# Altium PCB PCB IMU module.PcbDoc
Units mm, origin at the board's own origin, x right, y up, seen from the top; angles counter-clockwise.
Board outline 25 x 32.5 mm, 4 copper layers (L1(Sig), L2(GND), L3(GND), L4(Sig)), stack 0.749 mm thick; 73 components, 47 nets, 262 pads, 185 vias.
Unrouted connection lines stored in the file: 13.
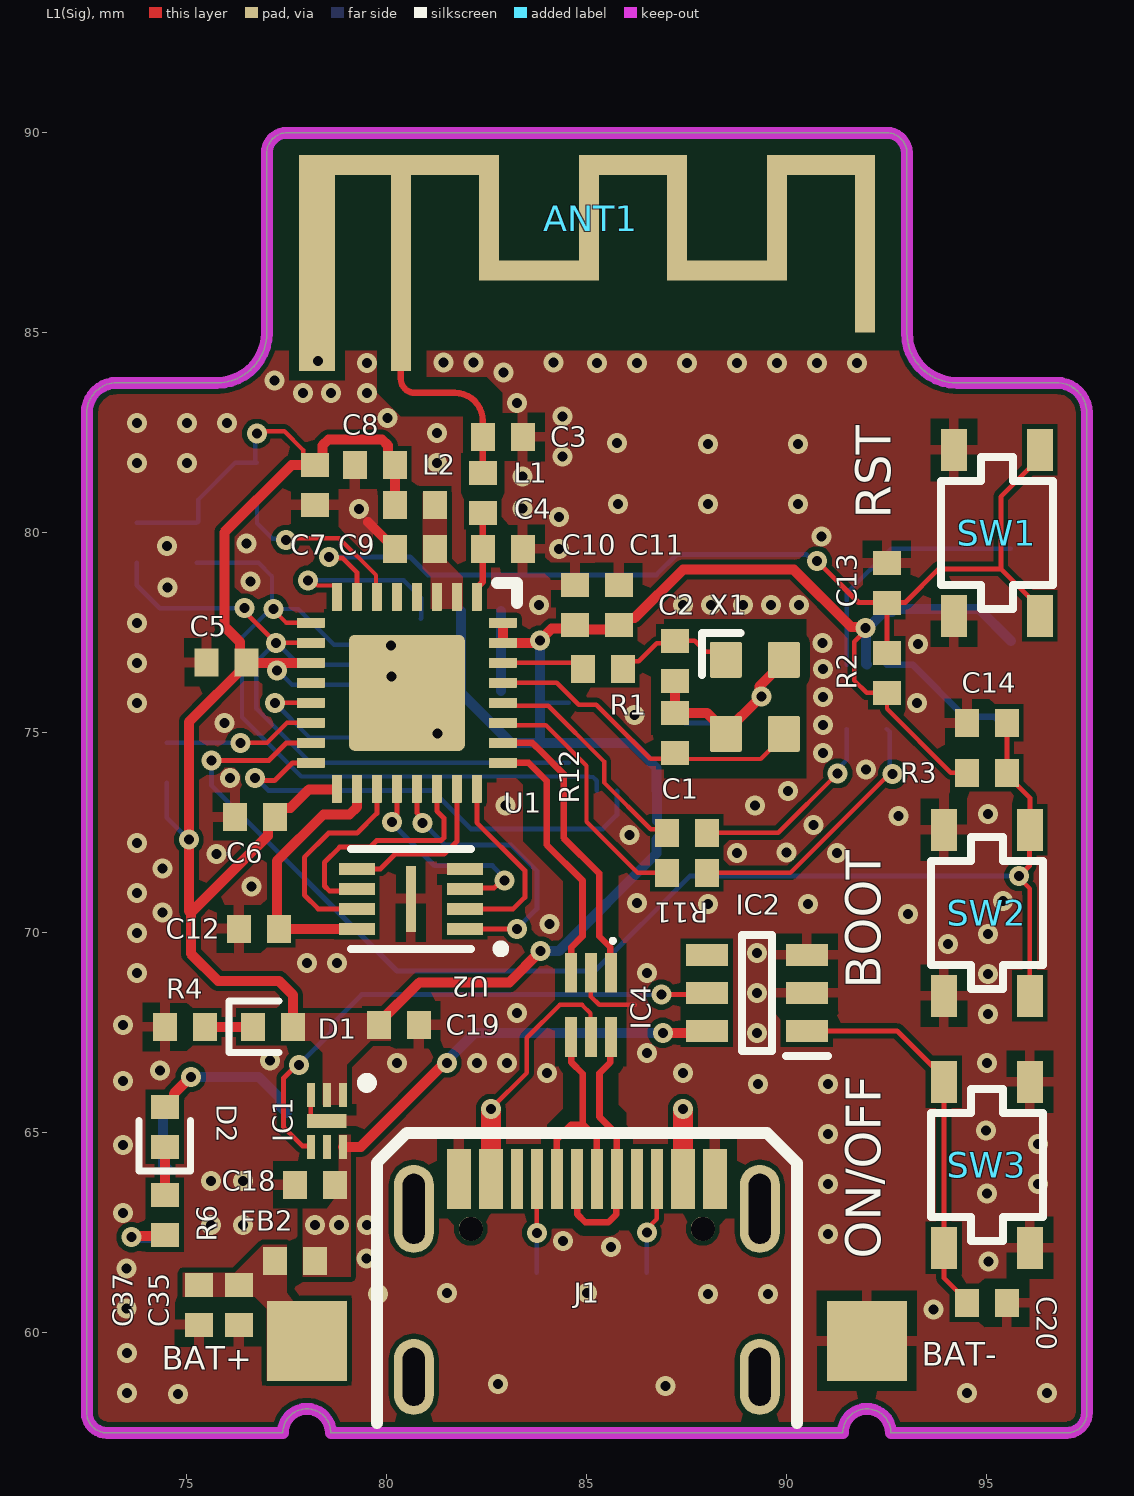
[diagram p0: L1(Sig) view]
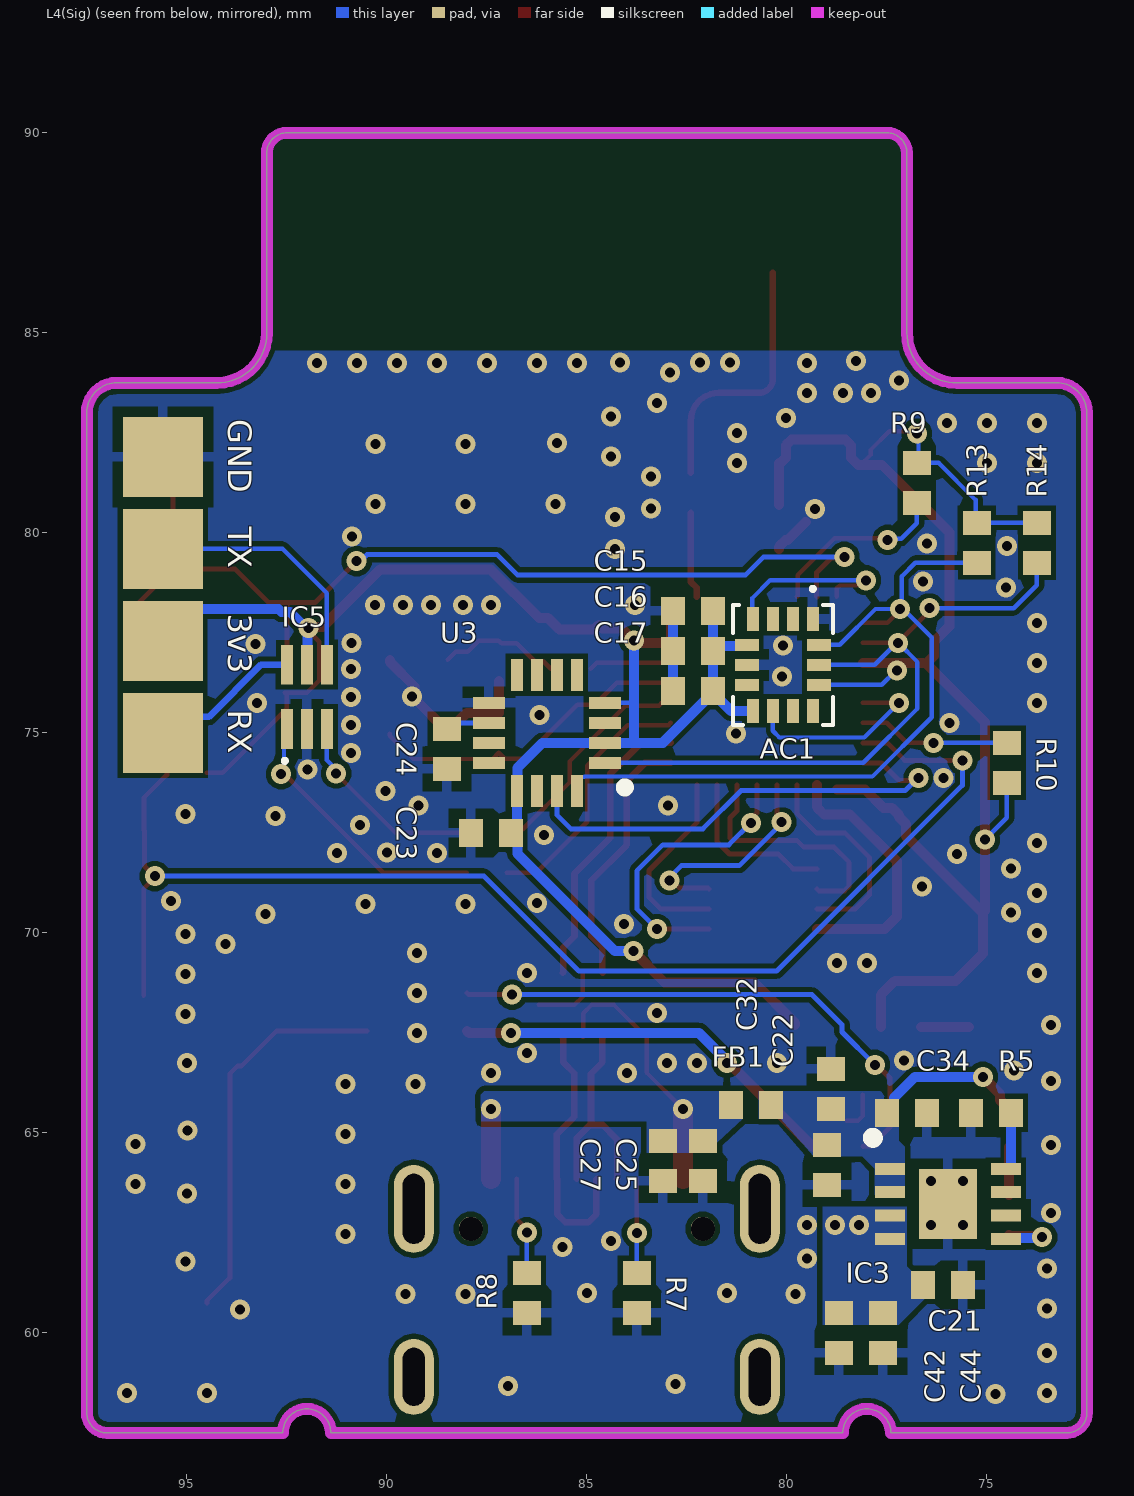
[diagram p1: L4(Sig) view, seen from below]
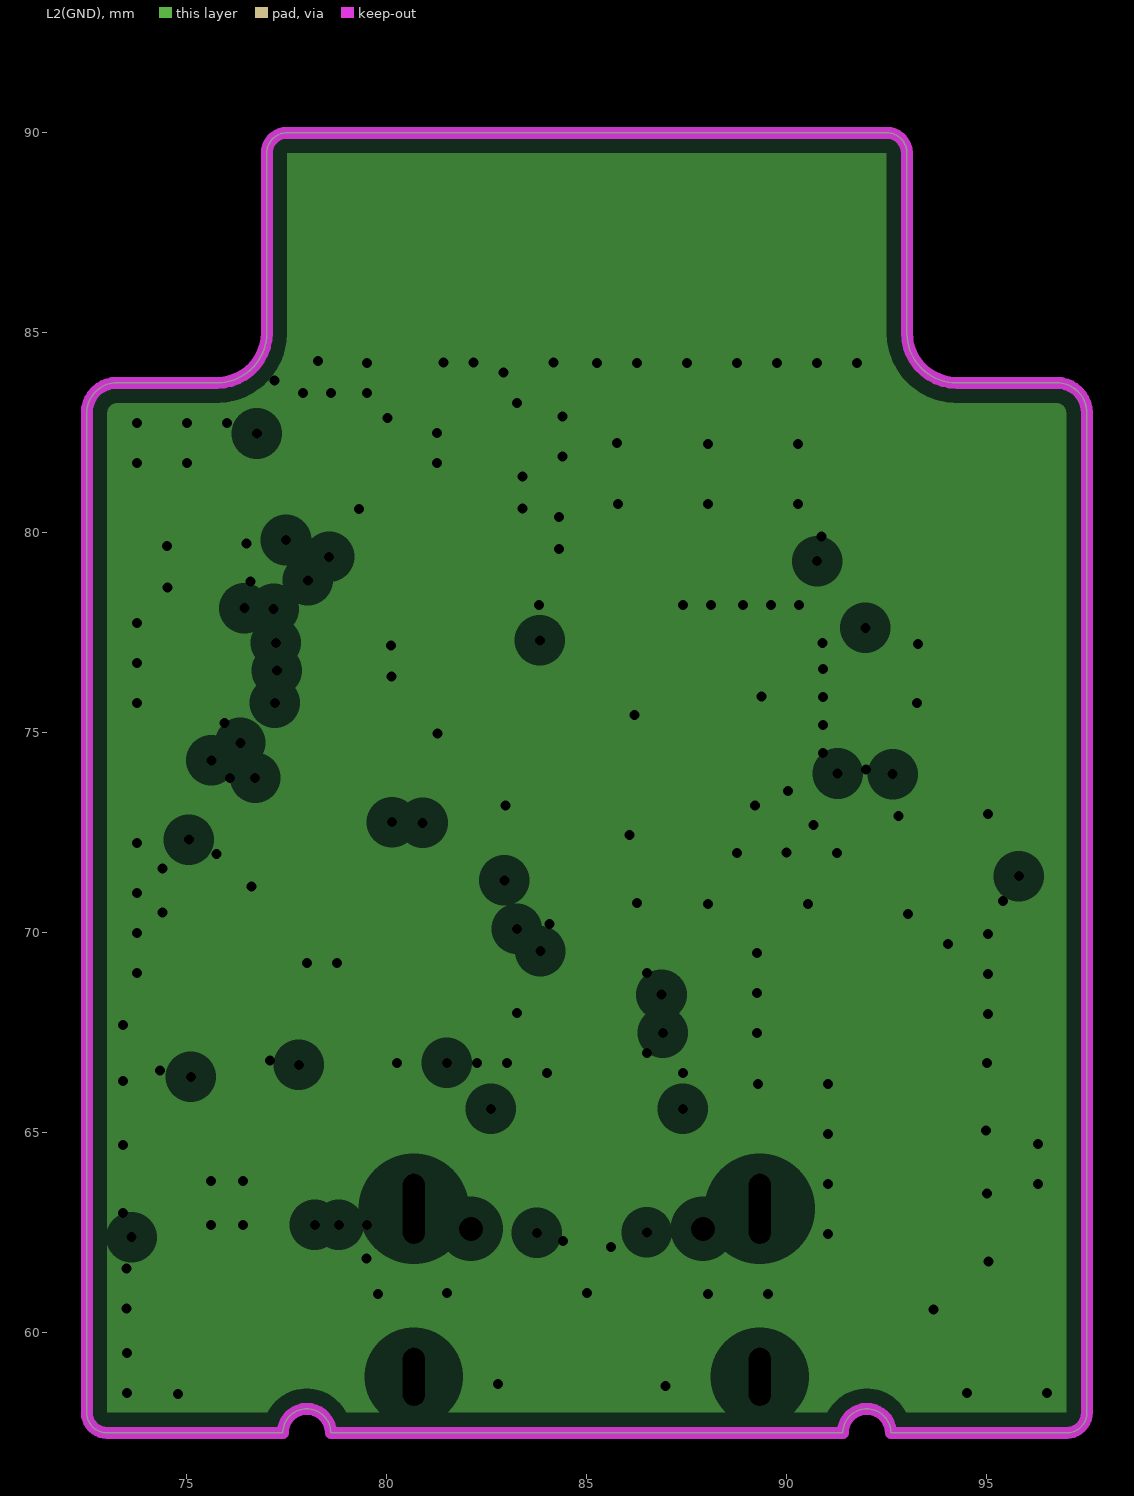
[diagram p2: L2(GND), clearances drawn from the general rule]
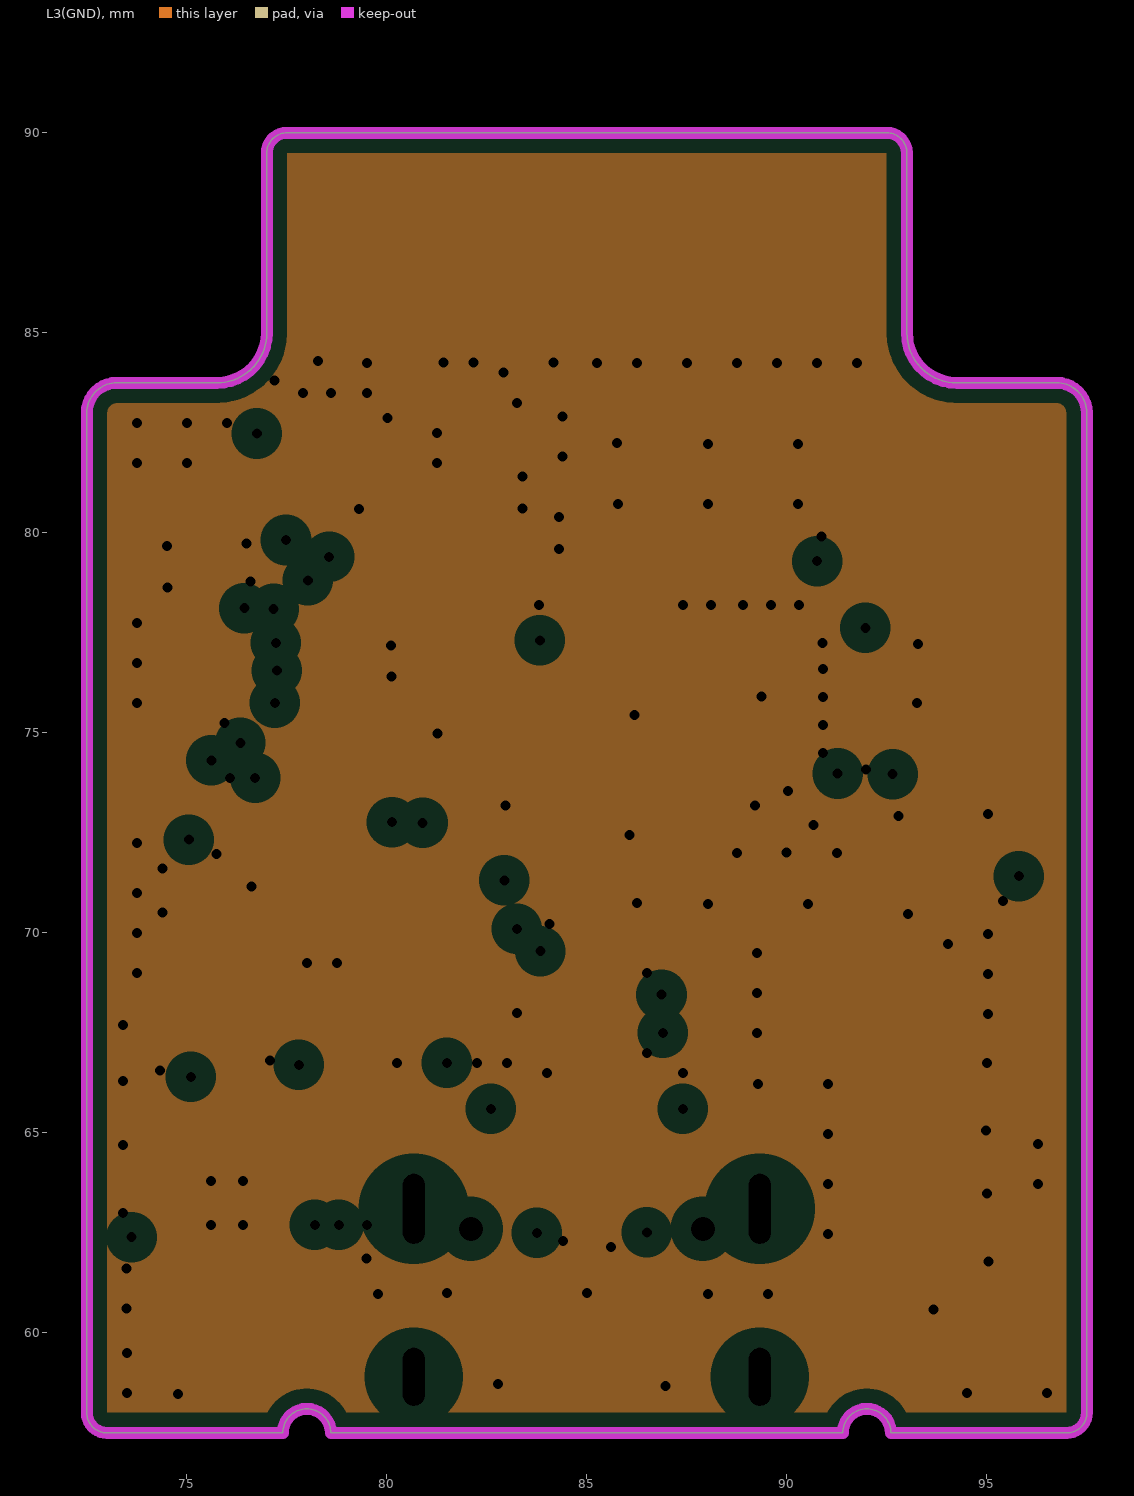
[diagram p3: L3(GND), clearances drawn from the general rule]
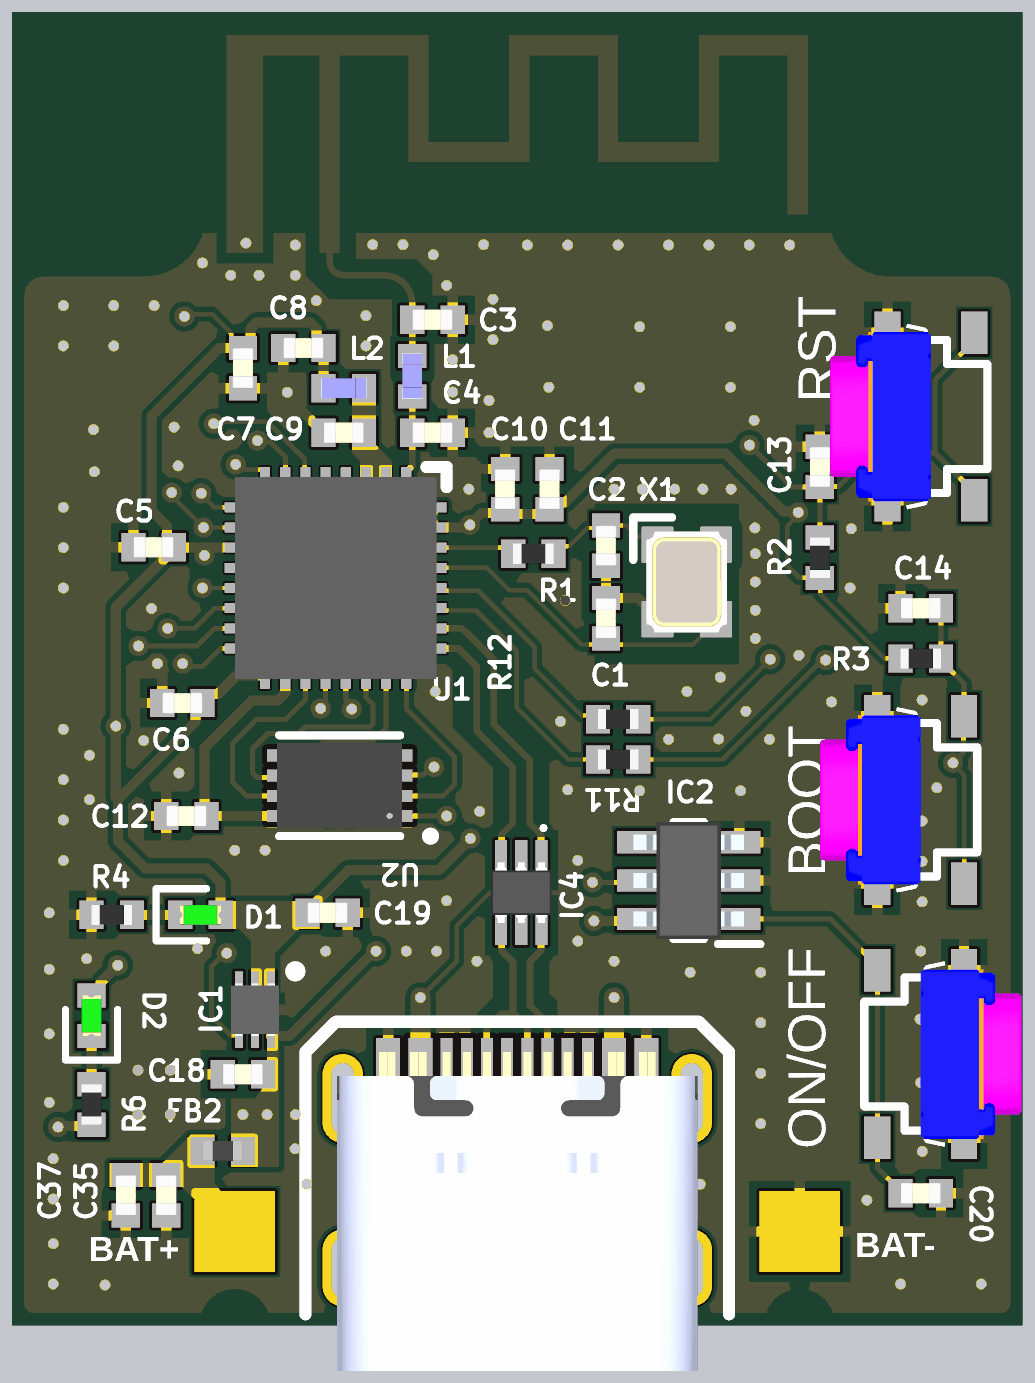
[diagram p4: 3D render of the assembled board from above, using the file's embedded part models]
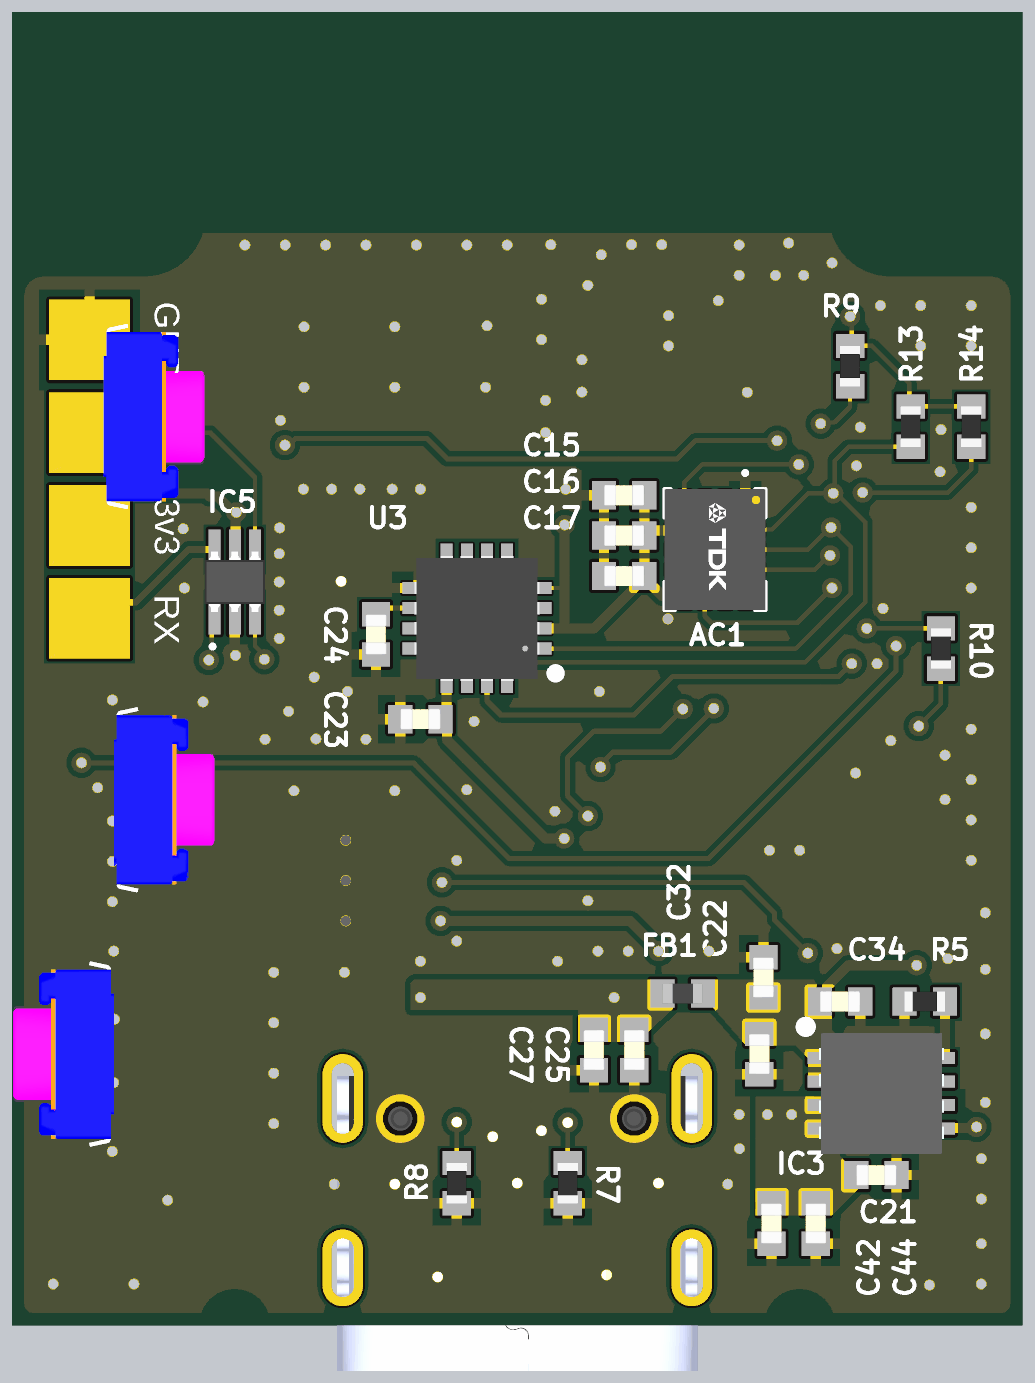
[diagram p5: 3D render of the assembled board from below, using the file's embedded part models]

## Layer stack, top to bottom
Top Solder: solder mask 0.0254, SM-001, Dk 3.8
L1(Sig): signal copper 0.035
Dielectric 2: prepreg 0.0994, PP-017, Dk 4.1
L2(GND): plane copper 0.0152, net GND
Dielectric 1: core 0.45, Core-039, Dk 4.6
L3(GND): plane copper 0.0152, net GND
Dielectric 3: prepreg 0.0994, PP-017, Dk 4.1
L4(Sig): signal copper 0.035
Bottom Solder: solder mask 0.0254, SM-001, Dk 3.8

## Board outline
72.5,58 ccw(c73,58) 73,57.5 77.4,57.5 cw(c78,57.5) 78,58.1 cw(c78,57.5) 78.6,57.5 91.4,57.5 cw(c92,57.5) 92,58.1 cw(c92,57.5) 92.6,57.5 97,57.5 ccw(c97,58) 97.5,58 97.5,83 ccw(c96.75,83) 96.75,83.75 94.25,83.75 cw(c94.25,85) 93,85 93,89.5 ccw(c92.5,89.5) 92.5,90 77.5,90 ccw(c77.5,89.5) 77,89.5 77,85 cw(c75.75,85) 75.75,83.75 73.25,83.75 ccw(c73.25,83) 72.5,83

## Design rules (kind name [scope] priority, off if disabled: settings)
Clearance MicroVia [AsMM(ViaDiameter) = 0.3 vs AsMM(ViaDiameter) = 0.3] p1: gap=0.1 ignorepadtopadclearanceinfootprint=FALSE
Clearance USB_Poly_Clearance [(InNamedPolygon('Top_Layer-GND')) vs (OnLayer('Mechanical 3'))] p2: gap=0.254 ignorepadtopadclearanceinfootprint=FALSE except(0: Arc-Hole Track-Hole SMDPad-Hole THPad-Hole Via-Hole Fill-Hole Poly-Hole Region-Hole Text-Hole)
Clearance USB_Clearance [(InDifferentialPairClass('All Differential Pairs'))] p3: gap=0.254 ignorepadtopadclearanceinfootprint=FALSE except(0: Arc-Hole Track-Hole SMDPad-Hole THPad-Hole Via-Hole Fill-Hole Poly-Hole Region-Hole Text-Hole; 0.127: SMDPad-SMDPad)
Clearance ANT_Clerance [InNet('ANT')] p4: gap=0.203 ignorepadtopadclearanceinfootprint=FALSE except(0: Arc-Hole Track-Hole SMDPad-Hole THPad-Hole Via-Hole Fill-Hole Poly-Hole Region-Hole Text-Hole)
Clearance Polygon_Clearance [(InNamedPolygon('Top_Layer-GND')) or (InNamedPolygon('Bottom_Layer-GND'))] p5: gap=0.254 ignorepadtopadclearanceinfootprint=FALSE except(0: Arc-Hole Track-Hole SMDPad-Hole THPad-Hole Via-Hole Fill-Hole Poly-Hole Region-Hole Text-Hole)
Clearance [All] p6: gap=0.125 ignorepadtopadclearanceinfootprint=FALSE except(0: Arc-Hole Track-Hole SMDPad-Hole THPad-Hole Via-Hole Fill-Hole Poly-Hole Region-Hole Text-Hole)
ComponentClearance [All] p1 off: gap=0.254 collisioncheckmode=3 verticalgap=0.254 showdistances=FALSE
DiffPairsRouting DiffPair_mcuDiffPairsRouting [InDifferentialPair ('NewDifferentialPair2')] p1: maxlimit=0.254 minlimit=0.254 mostfreqgap=0.254 toplayer_minwidth=0.166 toplayer_maxwidth=0.166 toplayer_prefwidth=0.166 bottomlayer_minwidth=0.166 bottomlayer_maxwidth=0.166 bottomlayer_prefwidth=0.166 maxuncoupledlength=12.7
DiffPairsRouting DiffPair_USBDiffPairsRouting [InDifferentialPair ('NewDifferentialPair1')] p2: maxlimit=0.254 minlimit=0.254 mostfreqgap=0.254 toplayer_minwidth=0.166 toplayer_maxwidth=0.166 toplayer_prefwidth=0.166 bottomlayer_minwidth=0.166 bottomlayer_maxwidth=0.166 bottomlayer_prefwidth=0.166 maxuncoupledlength=12.7
FabricationTestPointUsage TestPointUsage [All] p1: valid=0 allowmultiple=FALSE
FabricationTestpoint Testpoint [All] p1: side=3 testpointundercomponent=TRUE minsize=1.016 maxsize=2.54 preferedsize=1.524 minholesize=0 maxholesize=1.016 preferedholesize=0.813 testpointgrid=0.025 allowsidetop=TRUE allowsidebottom=TRUE usegrid=TRUE gridtolerance=0
Height [All] p1 off: minheight=0 maxheight=25.4 prefheight=12.7
HoleSize [All] p1: absolutevalues=TRUE maxlimit=5 minlimit=0.1 maxpercent=80.000 minpercent=20.000
HoleToHoleClearance HoleToHoleClearance_L1L2 [InDrillLayerPair('Top Layer - Mid-Layer 1') vs InDrillLayerPair('Top Layer - Mid-Layer 1')] p1: gap=0.225 allowstackedmicrovias=TRUE
HoleToHoleClearance HoleToHoleClearance_L1L2_L1L3 [InDrillLayerPair('Top Layer - Mid-Layer 1') vs InDrillLayerPair('Top Layer - Mid-Layer 2')] p2: gap=0.225 allowstackedmicrovias=TRUE
HoleToHoleClearance HoleToHoleClearance_L1L3 [InDrillLayerPair('Top Layer - Mid-Layer 2') vs InDrillLayerPair('Top Layer - Mid-Layer 2')] p3: gap=0.225 allowstackedmicrovias=TRUE
HoleToHoleClearance HoleToHoleClearance_L1L3_L3L4 [InDrillLayerPair('Top Layer - Mid-Layer 2') vs InDrillLayerPair('Mid-Layer 2 - Mid-Layer 3')] p4: gap=0.225 allowstackedmicrovias=TRUE
HoleToHoleClearance HoleToHoleClearance_L3L4 [InDrillLayerPair('Mid-Layer 2 - Mid-Layer 3') vs InDrillLayerPair('Mid-Layer 2 - Mid-Layer 3')] p5: gap=0.225 allowstackedmicrovias=TRUE
HoleToHoleClearance HoleToHoleClearance_L3L4_L4L6 [InDrillLayerPair('Mid-Layer 2 - Mid-Layer 3') vs InDrillLayerPair('Mid-Layer 3 - Bottom Layer')] p6: gap=0.225 allowstackedmicrovias=TRUE
HoleToHoleClearance HoleToHoleClearance_L4L6 [InDrillLayerPair('Mid-Layer 3 - Bottom Layer') vs InDrillLayerPair('Mid-Layer 3 - Bottom Layer')] p7: gap=0.225 allowstackedmicrovias=TRUE
HoleToHoleClearance HoleToHoleClearance_L1L2_L1L6 [InDrillLayerPair('Top Layer - Mid-Layer 1') vs InDrillLayerPair('Top Layer - Bottom Layer')] p8: gap=0.275 allowstackedmicrovias=FALSE
HoleToHoleClearance HoleToHoleClearance_L1L3_L1L6 [InDrillLayerPair('Top Layer - Mid-Layer 2') vs InDrillLayerPair('Top Layer - Bottom Layer')] p9: gap=0.275 allowstackedmicrovias=FALSE
HoleToHoleClearance HoleToHoleClearance_L3L4_L1L6 [InDrillLayerPair('Mid-Layer 2 - Mid-Layer 3') vs InDrillLayerPair('Top Layer - Bottom Layer')] p10: gap=0.275 allowstackedmicrovias=FALSE
HoleToHoleClearance HoleToHoleClearance_L4L6_L1L6 [InDrillLayerPair('Mid-Layer 3 - Bottom Layer') vs InDrillLayerPair('Top Layer - Bottom Layer')] p11: gap=0.275 allowstackedmicrovias=FALSE
HoleToHoleClearance HoleToHoleClearance_L1L6 [InDrillLayerPair('Top Layer - Bottom Layer') vs InDrillLayerPair('Top Layer - Bottom Layer')] p12: gap=0.45 allowstackedmicrovias=FALSE
HoleToHoleClearance [All] p13: gap=0.254 allowstackedmicrovias=TRUE
MatchedLengths DiffPair_mcuMatchedLengths [InDifferentialPair ('NewDifferentialPair2')] p1: tolerance=25.4 checknetsindiffpair=FALSE checkdiffpairvsdiffpair=TRUE checkxsignals=TRUE checkothers=TRUE
MatchedLengths DiffPair_USBMatchedLengths [InDifferentialPair ('NewDifferentialPair1')] p2: tolerance=25.4 checknetsindiffpair=FALSE checkdiffpairvsdiffpair=TRUE checkxsignals=TRUE checkothers=TRUE
MatchedLengths DiffPair_DIFF_USBMatchedLengths [InDifferentialPairClass('DIFF_USB')] p3: tolerance=25.4 checknetsindiffpair=FALSE checkdiffpairvsdiffpair=TRUE checkxsignals=TRUE checkothers=TRUE
MinimumAnnularRing [All] p1 off: minimumring=0.152
MinimumSolderMaskSliver [HasFootprint('ALL')] p1: minsoldermaskwidth=0.097
NetAntennae [All] p1 off: netantennaetolerance=0
PlaneClearance [All] p1: clearance=0.508
PlaneConnect [All] p1: planeconnectstyle=Direct reliefexpansion=0.508 reliefentries=4 reliefconductorwidth=0.254 reliefairgap=0.254
PolygonConnect PolygonConnect_1 [isVia and innet(gnd) or isVia and innet('VDD') or InNet('NetBAT+_1') or InNet('Vbat') or InNet('VDD')or InNet('Vin') or InNet('NetC9_2')or InNet('3v3')] p1: connectstyle=Direct reliefconductorwidth=0.254 reliefentries=4 polygonreliefangle="90 Angle" airgapwidth=0.254
PolygonConnect [All] p2: connectstyle=Relief reliefconductorwidth=0.254 reliefentries=4 polygonreliefangle="90 Angle" airgapwidth=0.254
RoutingVias [All] p1: holewidth=0.25 width=0.5 viastyle="Through Hole" minholewidth=0.1 minwidth=0.1 maxholewidth=0.711 maxwidth=1.27
SilkToSolderMaskClearance SilkscreenOverComponentPads [HasFootprint('All')] p1: minsilkscreentomaskgap=0.254 clearancetoexposedcopper=TRUE
SolderMaskExpansion SolderMaskExpansion_via [IsVia] p1: expansion=0.076 istentingtop=TRUE
SolderMaskExpansion [All] p2: expansion=0.076 istentingtop=FALSE
UnRoutedNet [InNet('ANT')] p1:
Width [All] p1: maxlimit=10.16 minlimit=0.11 preferedwidth=0.125 minimp=50.000000 maximp=50.000000 favimp=50.000000
17 further rules are at their usual default settings.

## Classes and differential pairs
differential pair class DIFF_USB: USB.D
component class Designator: AC1 C15 C16 C17
differential pair NewDifferentialPair2: +USB.D_P -USB.D_N
differential pair NewDifferentialPair1: +D_P -D_N

## Components (designator, comment, footprint, x,y, rotation, side; value= is the part's Value field where it differs from the comment)
3v3 "3v3" PAD_SQ_2MM 95.6,77.3 r270 bottom
AC1 "ICM-40627" ICM-40627 80.1,76.7 r270 bottom
ANT1 "PCB Antenna 2.4GHz 50Ohm" ANT_IFA_USB_2_4GHZ_50R 78.25,84.05 r0 top
BAT+ "BAT+" PAD_SQ_2MM 78,59.8 r90 top
BAT- "BAT-" PAD_SQ_2MM 92,59.8 r90 top
C1 "C0402_10V" CAP_0402 87.2,76.8 r90 top value=16pF
C2 "C0402_10V" CAP_0402 87.2,75 r270 top value=16pF
C3 "C0402_10V" CAP_0402 82.9,82.4 r180 top value=3pF
C4 "C0402_10V" CAP_0402 82.9,79.6 r180 top value=3pF
C5 "C0402_10V" CAP_0402 75.988,76.762 r180 top value=100nF
C6 "C0402_10V" CAP_0402 76.7,72.9 r0 top value=100nF
C7 "C0402_10V" CAP_0402 78.2,81.2 r90 top value=10uF
C8 "C0402_10V" CAP_0402 79.7,81.7 r0 top value=100nF
C9 "C0402_10V" CAP_0402 80.7,79.6 r0 top value=100nF
C10 "C0402_10V" CAP_0402 84.7,78.2 r270 top value=10nF
C11 "C0402_10V" CAP_0402 85.8,78.2 r90 top value=1uF
C12 "C0402_10V" CAP_0402 76.8,70.1 r0 top value=1uF
C13 "C0402_10V" CAP_0402 92.5,78.75 r90 top value=100nF
C14 "C0402_10V" CAP_0402 95,75.25 r180 top value=100nF
C15 "C0402_10V" CAP_0402 82.35,78.05 r180 bottom value=10nF
C16 "C0402_10V" CAP_0402 82.35,77.05 r180 bottom value=100nF
C17 "C0402_10V" CAP_0402 82.35,76.05 r180 bottom value=2.2uF
C18 "C0402_10V" CAP_0402 78.2,63.7 r0 top value=2.2uF
C19 "C0402_10V" CAP_0402 80.3,67.7 r180 top value=2.2uF
C20 "C0402_10V" CAP_0402 95,60.75 r0 top value=100nF
C21 "C0402_10V" CAP_0402 76.1,61.2 r0 bottom value=4.7uF
C22 "C0402_10V" CAP_0402 79,64.2 r90 bottom value=4.7uF
C23 "C0402_10V" CAP_0402 87.4,72.5 r180 bottom value=4.7uF
C24 "C0402_10V" CAP_0402 88.5,74.6 r270 bottom value=4.7uF
C25 "C0402_10V" CAP_0402 82.1,64.3 r90 bottom value=10uF
C27 "C0402_10V" CAP_0402 83.1,64.3 r90 bottom value=100nF
C32 "C0402_10V" CAP_0402 78.9,66.1 r270 bottom value=100nF
C34 "C0402_10V" CAP_0402 77,65.5 r0 bottom value=10uF
C35 "C0402_10V" CAP_0402 76.3,60.7 r90 top value=10uF
C37 "C0402_10V" CAP_0402 75.3,60.7 r90 top value=100nF
C42 "C0402_10V" CAP_0402 78.7,60 r90 bottom value=100nF
C44 "C0402_10V" CAP_0402 77.6,60 r90 bottom value=10uF
D1 "GREEN" LED_0402_GREEN 77.15,67.65 r180 top
D2 "GREEN" LED_0402_GREEN 74.45,65.15 r270 top
FB1 "FB0402" FB_0402 80.9,65.7 r180 bottom
FB2 "FB0402" FB_0402 77.7,61.8 r0 top
GND "GND" PAD_SQ_2MM 95.6,81.9 r270 bottom
IC1 "MIC5528-3.3YMT-T5" SON40P120X120X60-7N-D 78.5,65.3 r270 top
IC2 "MAX16054AZT+T" SOT95P275X110-6N 89.25,68.5 r180 top
IC3 "MCP73831T-2ATI/MC" SON65P300X300X80-9N-D 75.975,63.225 r180 bottom
IC4 "USBLC6-2P6" USBLC62P6 85.1,68.2 r180 top
IC5 "USBLC6-2P6" USBLC62P6 92,75.9 r180 bottom
J1 "TYPE-C-31-M-12" TYPE-C-31-M-12 85,61 r0 top
L1 "L0402" IND_0402 82.4,81 r270 top value=2.2nH
L2 "L0402" IND_0402 80.7,80.7 r0 top value=2nH
R1 "R0402" RES_0402 85.4,76.6 r0 top value=22
R2 "R0402" RES_0402 92.5,76.5 r270 top value=5.1k
R3 "R0402" RES_0402 95,74 r180 top value=5.1k
R4 "R0402" RES_0402 74.95,67.65 r180 top value=1k
R5 "R0402" RES_0402 74.9,65.5 r0 bottom value=2k
R6 "R0402" RES_0402 74.45,62.95 r270 top value=1k
R7 "R0402" RES_0402 83.75,61 r270 bottom value=5.1k
R8 "R0402" RES_0402 86.5,61 r270 bottom value=5.1k
R9 "R0402" RES_0402 76.75,81.25 r270 bottom value=5.1k
R10 "R0402" RES_0402 74.5,74.25 r90 bottom value=5.1k
R11 "R0402" RES_0402 87.5,71.5 r180 top value=470
R12 "R0402" RES_0402 87.5,72.5 r180 top value=470
R13 "R0402" RES_0402 75.25,79.75 r90 bottom value=5.1k
R14 "R0402" RES_0402 73.75,79.75 r90 bottom value=5.1k
RX "RX" PAD_SQ_2MM 95.6,75 r270 bottom
SW1 "SKRPANE010" SKRPANE010 95.25,80 r90 top
SW2 "SKRPANE010" SKRPANE010 95,70.5 r90 top
SW3 "SKRPANE010" SKRPANE010 95,64.2 r270 top
TX "TX" PAD_SQ_2MM 95.6,79.6 r270 bottom
U1 "W25Q16JVUXIQ" USON-8-2X3MM 80.6,70.85 r180 top
U2 "ESP32-C3" QFN32-5x5 80.5,76 r270 top
U3 "MMC5983MA" MMC5983MA-LGA 86,75 r270 bottom
X1 "40MHz" XTAL_2520 89.2,75.9 r270 top

## Footprints (in the part's own frame and the unit in brackets; to place one, negate y for a bottom-side part, rotate by r counter-clockwise, add the part's x,y. Pads: shape width x height; smd on the part's side, far side on the other; paste and mask are expansions set on the pad)
ANT_IFA_USB_2_4GHZ_50R [mm]
  rect 5x0.5 smd paste-2539.97 mask+0.102: 1(2.05,5.15)
  rect 0.5x4.9 smd paste-2539.97 mask+0.102: 1(2.1,2.45)
  rect 0.5x2.64 smd paste-2539.97 mask+0.102: 1(4.3,3.58) 1(6.8,3.58) 1(9,3.58) 1(11.5,3.58)
  rect 2x0.5 smd paste-2539.97 mask+0.102: 1(5.55,2.51) 1(10.25,2.51)
  rect 2.7x0.5 smd paste-2539.97 mask+0.102: 1(7.9,5.15) 1(12.6,5.15)
  rect 0.5x3.94 smd paste-2539.97 mask+0.102: 1(13.7,2.93)
  rect 0.9x4.9 smd paste-2539.97 mask+0.102: 2(0,2.45)
CAP_0402 [mm]
  rect 0.6x0.7 smd: 1(-0.5,0) 2(0.5,0)
  body extent -0.5,-0.26 0.5,0.26, height 0.37
FB_0402 [mm]
  rect 0.6x0.7 smd: 1(-0.5,0) 2(0.5,0)
  body extent -0.5,-0.25 0.5,0.25, height 0.51
ICM-40627 [mm]
  rect 0.6x0.3 smd: 1(-1.15,0.75) 2(-1.15,0.25) 3(-1.15,-0.25) 4(-1.15,-0.75) 8(1.15,-0.75) 9(1.15,-0.25) 10(1.15,0.25) 11(1.15,0.75)
  rect 0.3x0.6 smd: 5(-0.5,-0.9) 6(0,-0.9) 7(0.5,-0.9) 12(0.5,0.9) 13(0,0.9) 14(-0.5,0.9)
  silkscreen extent -1.95,-1.25 1.5,1.25, body extent -1.5,-1.25 1.5,1.25, height 0.9
IND_0402 [mm]
  rect 0.6x0.7 smd: 1(-0.5,0) 2(0.5,0)
  body extent -0.56,-0.26 0.56,0.26, height 0.67
LED_0402_GREEN [mm]
  rect 0.6x0.7 smd: A(-0.5,0) K(0.5,0)
  silkscreen extent -0.15,-0.65 1.1,0.65, body extent -0.51,-0.25 0.51,0.25, height 0.45
MMC5983MA-LGA [mm]
  rect 0.3x0.8 smd mask+0.05: 1(0.75,1.45) 2(0.25,1.45) 3(-0.25,1.45) 4(-0.75,1.45) 9(-0.75,-1.45) 10(-0.25,-1.45) 11(0.25,-1.45) 12(0.75,-1.45)
  rect 0.8x0.3 smd mask+0.05: 5(-1.45,0.75) 6(-1.45,0.25) 7(-1.45,-0.25) 8(-1.45,-0.75) 13(1.45,-0.75) 14(1.45,-0.25) 15(1.45,0.25) 16(1.45,0.75)
  silkscreen extent 1.26,1.85 1.47,2.05, body extent -1.55,-1.55 1.55,1.55, height 0.99
PAD_SQ_2MM [mm]
  rect 2x2 smd paste-1: 1(0,0)
QFN32-5x5 [mm]
  rrect10% 0.7x0.25 smd mask+0.05: 1(-2.4,1.75) 2(-2.4,1.25) 3(-2.4,0.75) 4(-2.4,0.25) 5(-2.4,-0.25) 6(-2.4,-0.75) 7(-2.4,-1.25) 8(-2.4,-1.75) 17(2.4,-1.75) 18(2.4,-1.25) 19(2.4,-0.75) 20(2.4,-0.25) 21(2.4,0.25) 22(2.4,0.75) 23(2.4,1.25) 24(2.4,1.75)
  rrect10% 0.25x0.7 smd mask+0.05: 9(-1.75,-2.4) 10(-1.25,-2.4) 11(-0.75,-2.4) 12(-0.25,-2.4) 13(0.25,-2.4) 14(0.75,-2.4) 15(1.25,-2.4) 16(1.75,-2.4) 25(1.75,2.4) 26(1.25,2.4) 27(0.75,2.4) 28(0.25,2.4) 29(-0.25,2.4) 30(-0.75,2.4) 31(-1.25,2.4) 32(-1.75,2.4)
  rrect10% 2.9x2.9 smd mask+0.07: 33(0,0)
  silkscreen extent -2.75,2.25 -2.25,2.75, body extent -2.5,-2.5 2.5,2.5, height 0.85
RES_0402 [mm]
  rect 0.6x0.7 smd: 1(-0.5,0) 2(0.5,0)
  body extent -0.5,-0.25 0.5,0.25, height 0.3
SKRPANE010 [mm]
  rect 1.05x0.65 smd: 12(-2.075,1.075) 12(2.075,1.075) 34(-2.075,-1.075) 34(2.075,-1.075)
  silkscreen extent -1.9,-1.4 1.9,1.4, body extent -2.3,-1.6 2.3,1.6, height 2.51
SON40P120X120X60-7N-D [mm]
  rect 0.6x0.2 smd: 1(-0.65,0.4) 2(-0.65,0) 3(-0.65,-0.4) 4(0.65,-0.4) 5(0.65,0) 6(0.65,0.4)
  rect 0.35x0.99 smd: 7(0,0)
  silkscreen extent -1.07,0.88 -0.83,1.13, body extent -0.65,-0.6 0.65,0.6, height 0.6
SON65P300X300X80-9N-D [mm]
  rect 0.75x0.3 smd: 1(-1.45,0.875) 2(-1.45,0.29) 3(-1.45,-0.29) 4(-1.45,-0.875) 5(1.45,-0.875) 6(1.45,-0.29) 7(1.45,0.29) 8(1.45,0.875)
  rect 1.45x1.75 smd: 9(0,0)
  silkscreen extent -2,1.53 -1.75,1.77, body extent -1.55,-1.5 1.55,1.5, height 0.8
SOT95P275X110-6N [mm]
  rect 1.05x0.55 smd: 1(-1.25,0.95) 2(-1.25,0) 3(-1.25,-0.95) 4(1.25,-0.95) 5(1.25,0) 6(1.25,0.95)
  silkscreen extent -1.78,-1.45 0.38,1.58, body extent -1.38,-1.45 1.38,1.45, height 1.1
TYPE-C-31-M-12 [mm]
  rect 0.6x1.5 smd mask+0.07: A1B12(-3.2,2.85) B1A12(3.2,2.85)
  rect 0.6x1.5 smd mask+0.14: A4B9(-2.4,2.85) B4A9(2.4,2.85)
  rect 0.3x1.5 smd mask+0.14: A5(-1.25,2.85) A6(-0.25,2.85) A7(0.25,2.85) A8(1.25,2.85) B5(1.75,2.85) B6(0.75,2.85) B7(-0.75,2.85) B8(-1.75,2.85)
  round 0.6 hole 0.6 unplated mask+0.3: MH(-2.9,1.6) MH(2.9,1.6)
  oval 1x1.9 hole 0.55 slot 1.45 at 90 deg mask+0.05: SH(-4.325,-2.1) SH(4.325,-2.1)
  oval 1x2.2 hole 0.55 slot 1.75 at 90 deg mask+0.05: SH(-4.325,2.1) SH(4.325,2.1)
  silkscreen extent -5.25,-3.25 5.25,4, body extent -4.47,-4.65 4.47,3.25, height 3.32
USBLC62P6 [mm]
  rect 0.3x0.99 smd: 1(-0.5,-0.805) 2(0,-0.805) 3(0.5,-0.805) 4(0.5,0.805) 5(0,0.805) 6(-0.5,0.805)
  silkscreen extent -0.6,-1.65 -0.5,-1.55, body extent -0.75,-0.75 0.75,0.75, height 0.46
USON-8-2X3MM [mm]
  rect 0.9x0.3 smd mask+0.13: 1(-1.35,0.75) 2(-1.35,0.25) 3(-1.35,-0.25) 4(-1.35,-0.75) 5(1.35,-0.75) 6(1.35,-0.25) 7(1.35,0.25) 8(1.35,0.75)
  rect 0.25x1.65 smd paste-0.1: 9(0,0)
  silkscreen extent -2.35,-1.25 1.5,1.35, body extent -1.55,-1.05 1.55,1.05, height 0.61
XTAL_2520 [mm]
  rrect10% 0.9x0.8 smd mask+0: 1(-0.925,-0.725) 2(0.925,-0.725) 3(0.925,0.725) 4(-0.925,0.725)
  silkscreen extent -1.6,-1.33 -0.54,-0.36, body extent -1.25,-1 1.25,1, height 0.8

## Part data
3v3 BAT+ BAT- GND RX TX: library part PAD_SQ_2MM, "Test Point Square 2mm"
AC1: "Accelerometer", Manufacturer_Name=TDK, Mouser Part Number=410-ICM-40627, Arrow Part Number=ICM-40627, Arrow Price/Stock=https://www.arrow.com/en/products/icm-40627/invensense?region=nac, Datasheet Link=https://3cfeqx1hf82y3xcoull08ihx-wpengine.netdna-ssl.com/wp-content/uploads/2021/04/DS-000381-ICM-40627-v1.2.pdf, Manufacturer_Part_Number=ICM-40627, Mouser Price/Stock=https://www.mouser.co.uk/ProductDetail/TDK-InvenSense/ICM-40627?qs=iLbezkQI%252BsgePVjJNSY7vQ%3D%3D
ANT1: library part ANT_IFA_USB_2_4GHZ_50R, "Inverted F 2.4GHz ISM PCB Antenna 50 Ohm", ComponentLink1Description=Datasheet, ComponentLink1URL=https://www.ti.com/lit/an/swra117d/swra117d.pdf
C1 C2 C3 C4 C5 C6 C7 C8 C9 C10 C11 C12 C13 C14 C15 C16 C17 C18 C19 C20 C21 C22 C23 C24 C25 C27 C32 C34 C35 C37 C42 C44: library part CAP_0402_10V, "Capacitor SMD 0402 10V"
D1 D2: library part LED_0402_GREEN, "LED 0402 GREEN SMD"
FB1 FB2: library part FB_0402, "Ferrite Bead SMD 0402"
IC1: "LDO 3v3 500mA", Manufacturer_Name=Microchip, Mouser Part Number=998-MIC5528-3.3YMTT5, Arrow Part Number=MIC5528-3.3YMT-T5, Arrow Price/Stock=https://www.arrow.com/en/products/mic5528-3.3ymt-t5/microchip-technology?region=nac, Datasheet Link=https://nl.mouser.com/datasheet/2/268/MIC5528_High_Performance_500mA_LDO_in_Thin_and_Ext-1891284.pdf, Height=0.6mm, Manufacturer_Part_Number=MIC5528-3.3YMT-T5, Mouser Price/Stock=https://www.mouser.co.uk/ProductDetail/Microchip-Technology/MIC5528-3.3YMT-T5?qs=U6T8BxXiZAUrsVLummtswg%3D%3D
IC2: "Integrated Circuit", Manufacturer_Name="Analog Devices", Mouser Part Number=700-MAX16054AZTT, Arrow Part Number=MAX16054AZT+T, Arrow Price/Stock=https://www.arrow.com/en/products/max16054aztt/maxim-integrated?region=nac, Datasheet Link=https://datasheet.datasheetarchive.com/originals/distributors/SFDatasheet-4/sf-00087822.pdf, Height=1.1mm, Manufacturer_Part_Number=MAX16054AZT+T, Mouser Price/Stock=https://www.mouser.co.uk/ProductDetail/Analog-Devices-Maxim-Integrated/MAX16054AZT%2bT?qs=CDqwynd4ZNoG75aAAjGoqQ%3D%3D
IC3: "Battery Management Charge mgnt contr", Manufacturer_Name=Microchip, Mouser Part Number=579-MCP73831T-2ATIMC, Datasheet Link=https://www.mouser.pl/datasheet/2/268/20001984g-846362.pdf, Manufacturer_Part_Number=MCP73831T-2ATI/MC
IC4 IC5: "Integrated Circuit", Manufacturer_Name=STMicroelectronics, Mouser Part Number=511-USBLC6-2P6, Arrow Part Number=USBLC6-2P6, Arrow Price/Stock=https://www.arrow.com/en/products/usblc6-2p6/stmicroelectronics?region=nac, Datasheet Link=https://datasheet.lcsc.com/szlcsc/STMicroelectronics-USBLC6-2P6_C15999.pdf, Height=0.6mm, Manufacturer_Part_Number=USBLC6-2P6, Mouser Price/Stock=https://www.mouser.co.uk/ProductDetail/STMicroelectronics/USBLC6-2P6?qs=6ARB0lp6jlViGcbUSvj1Mw%3D%3D
J1: "USB Type C Connector Horizontal SMT", Manufacturer="Koren Hroparts", Manufacturer Part Number=TYPE-C-31-M-12
L1 L2: library part IND_0402, "Inductor SMD 0402"
R1 R2 R3 R4 R5 R6 R7 R8 R9 R10 R11 R12 R13 R14: library part RES_0402, "Resistor SMD 0402"
SW1 SW2 SW3: "Tactile Switch SMD SPST", Manufacturer="Alps Alpine", Manufacturer Part Number=SKRPANE010
U1: "16M-BIT SERIAL FLASH MEMORY WITH DUAL/QUAD SPI USON-8", LCSC=C2843335, Manufacturer=Winbond, Manufacturer Part Number=W25Q16JVUXIQ
U2: "Ultra­Low­Power SoC with RISC­V Single­Core CPU Supporting IEEE 802.11b/g/n (2.4 GHz Wi­Fi) and Bluetooth® 5 (LE)", LCSC=C2838500, Manufacturer=Espressif, Manufacturer Part Number=ESP32-C3
U3: "±8 Gauss, High Performance 3-axis Magnetic Sensor I2C/SPI", Manufacturer=MEMSIC, Manufacturer Part Number=MMC5983MA
X1: library part XTAL_2520, "Crystal SMD 2520"

## Via types
v1: diameter 0.5, hole 0.25, L1(Sig) to L4(Sig), tented both sides, 185 vias

## Nets (pads, with @x,y where several pads share a name; then routed paths per layer and width w, separated by ;. In a path a pad name is that pad's centre, name@x,y a point inside that pad or via, vN(x,y) a via of type N, cw(c..) or ccw(c..) an arc to the next point about the centre after c; other vN are vias at no path point)
3v3: 3v3.1 AC1.5 AC1.8 AC1.12 C5.1 C6.2 C7.2 C8.2 C10.2 C11.1 C15.2 C16.2 C17.2 C19.2 C23.2 D1.A IC1.1 IC1.2 IC5.5 L2.1 R2.2 R3.2 R9.1 R10.1 R13.2 R14.2 U2.11 U2.17 U2.31 U2.32 U3.2 U3.4 U3.13 | length 84.9
  L1(Sig) w0.11: v1(76.751,82.482) 76.807,82.538 77.439,82.538 77.907,82.07 77.907,81.945 78.152,81.7 C7.2 ; v1(77.248,76.557) 77.248,76.645 v1@77.354,76.75 ; v1(91.963,77.625) 91.963,77.552 91.688,77.277 91.688,76.308 91.996,76 R2.2@92.55,76 ; R2.2 92.505,75.995 92.505,75.599 94.099,74.005 94.495,74.005 R3.2
  L1(Sig) w0.25: C5.1@76.607,76.75 77.354,76.75 U2.11 ; D1.A 77.65,68.45 77.3,68.8 75.778,68.8 75.1,69.478 75.1,70.5 ; U2.17@78.75,73.585 78.048,73.585 77.588,73.125 77.375,73.125 77.2,72.95 C6.2 77.025,72.725 77.025,72.425 75.1,70.5 ; C19.2 79.8,67.75 80.811,68.761 83.061,68.761 83.837,69.537 v1(83.837,69.542) ; L2.1 C8.2@80.2,81.75 ; C8.2 80.025,81.875 80.025,82.187 79.879,82.334 78.54,82.334 78.393,82.187 78.393,81.875 78.218,81.7 C7.2 78.198,81.698 77.621,81.698 75.938,80.014 75.938,77.662 76.323,77.277 76.323,76.927 C5.1 76.488,76.712 75.05,75.274 75.05,70.55 75.1,70.5 ; U2.32 U2.31 83.693,77.25 83.757,77.314 v1(83.825,77.314) 84.121,77.611 84.611,77.611 C10.2 84.812,77.588 85.688,77.588 85.975,77.875 86.198,77.875 87.402,79.08 90.175,79.08 91.604,77.65 91.938,77.65 v1(91.963,77.625)
  L4(Sig) w0.11: R14.2 R13.2 75.281,80.281 75.281,80.824 76.207,81.75 R9.1@76.708,81.75 ; R10.1 74.5,72.879 v1(75.05,72.328) ; R9.1 76.708,81.792 76.708,82.439 v1(76.751,82.482) ; v1(77.248,76.557) 77.273,76.557 77.63,76.2 AC1.12 ; 83.825,75.7 83.875,75.75 U3.4
  L4(Sig) w0.25: AC1.8 81.4,75.55 C17.2@81.85,76 ; AC1.5 81.025,77.175 81.725,77.175 C16.2 ; C15.2 C16.2 ; v1(83.825,77.314) 83.825,75.7 83.825,74.75 ; v1(83.837,69.542) 84.299,69.542 86.738,71.981 86.738,72.338 C23.2 ; U3.13@86.745,73.555 86.739,73.561 86.739,74.119 86.107,74.75 U3.2 83.825,74.75 ; U3.13@86.752,73.548 86.752,72.798 C23.2@87,72.55 ; IC5.5 91.981,76.724 91.981,77.606 v1(91.963,77.625) 92.031,77.625 92.424,78.019 92.63,78.019 92.707,78.096 94.804,78.096 3v3.1 ; C17.2@81.85,76 C17.2 C16.2 ; C17.2@81.85,76 83.1,74.75 83.825,74.75
ANT: ANT1.1 C3.2 L1.1 | length 6.6
  L1(Sig) w0.156: ANT1.1@80.35,86.5 80.35,83.85 ccw(c80.7,83.85) 80.7,83.5 81.7,83.5 cw(c81.7,82.8) 82.4,82.8 C3.2 L1.1
D_N: IC4.4 J1.A7 J1.B7 | length 5.6
  L1(Sig) w0.166: J1.B7 84.244,63.856 84.244,64.836 84.604,65.196 84.867,65.196 84.896,65.226 84.896,66.477 84.613,66.76 84.613,67.382 IC4.4 ; 84.896,65.225 85.25,64.871 J1.A7
D_P: IC4.6 J1.A6 J1.B6 | length 6.8
  L1(Sig) w0.166: J1.A6 84.763,63.837 84.763,62.96 84.96,62.763 85.54,62.763 85.737,62.96 85.737,63.837 J1.B6 85.75,64.965 85.316,65.399 85.316,66.489 85.587,66.76 85.587,67.382 IC4.6
GND: AC1.1 AC1.6 ANT1.2 BAT-.1 C1.1 C2.1 C3.1 C4.1 C5.2 C6.1 C7.1 C8.1 C9.1 C10.1 C11.2 C12.1 C13.2 C14.2 C15.1 C16.1 C17.1 C18.1 C19.1 C20.2 C21.1 C22.1 C23.1 C24.2 C25.1 C27.1 C32.1 C34.1 C35.1 C37.1 C42.1 C44.1 GND.1 IC1.3 IC1.7 IC2.2 IC2.3 IC3.6 IC3.9 IC4.2 IC5.2 J1.A1B12 J1.B1A12 R4.2 R5.2 R7.2 R8.2 SW1.12 SW2.12 SW3.12 U1.4 U1.9 U2.33 U3.9 U3.11 X1.2 X1.4 | length 10.5
  L1(Sig) w0.11: IC1.3 78.1,65.42 78.22,65.3 IC1.7 ; IC4.2@85.097,69.002 85.099,69.001 85.099,68.409 85.307,68.201 86.201,68.201
  L1(Sig) w0.25: C1.1 C2.1 88,75.5 X1.2@88.475,75.025 ; X1.2 X1.2@88.475,75.025 ; X1.4 89.925,76.775 89.311,76.161 89.311,75.861 X1.2@88.475,75.025
  L1(Sig) w0.254: 79.529,80.271 79.977,79.823 80.027,79.823 80.2,79.65 C9.1
  L4(Sig) w0.25: C17.1 C16.1 C15.1
  other v1: 74.784,58.475 73.5,58.5 94.5,58.5 96.5,58.5 86.972,58.675 82.784,58.725 73.5,59.5 93.665,60.579 73.498,60.607 79.784,60.975 88.034,60.975 89.534,60.975 81.5,61 85,61 73.498,61.607 95.038,61.787 79.492,61.853 85.607,62.151 84.4,62.3 91.034,62.475 75.6,62.7 76.4,62.7 79.5,62.7 73.4,63 95.001,63.49 91.034,63.725 96.284,63.725 75.6,63.8 76.4,63.8 73.4,64.7 96.284,64.725 91.034,64.975 94.983,65.064 89.284,66.225 91.034,66.225 73.4,66.3 84,66.5 87.4,66.5 74.327,66.563 80.25,66.75 82.25,66.75 83,66.75 95,66.75 77.077,66.813 86.5,67 89.25,67.5 73.4,67.7 95.034,67.975 83.25,68 89.25,68.5 95.034,68.975 73.75,69 86.5,69 78,69.25 78.75,69.25 89.25,69.5 94.034,69.725 95.034,69.975 73.75,70 84.065,70.216 93.034,70.475 74.398,70.507 88.034,70.725 90.534,70.725 86.25,70.75 95.4,70.8 73.75,71 76.615,71.164 74.398,71.607 75.741,71.968 88.75,72 89.99,72.009 91.25,72 73.75,72.25 86.07,72.444 90.666,72.694 92.788,72.927 95.034,72.975 82.965,73.184 89.206,73.186 90.033,73.54 76.084,73.875 91.981,74.081 90.9,74.5 81.265,74.985 90.9,75.2 75.936,75.242 86.189,75.441 73.75,75.75 93.25,75.75 90.9,75.9 89.365,75.914 80.115,76.414 90.9,76.6 73.75,76.75 80.1,77.189 93.28,77.218 90.889,77.241 73.75,77.75 83.8,78.2 87.4,78.2 88.1,78.2 88.9,78.2 89.6,78.2 90.3,78.2 74.521,78.631 76.593,78.778 84.3,79.6 74.498,79.675 76.496,79.737 90.87,79.906 84.3,80.4 79.3,80.6 83.398,80.607 85.784,80.725 88.034,80.725 90.284,80.725 83.398,81.407 73.75,81.75 75,81.75 81.25,81.75 84.398,81.907 88.034,82.225 90.284,82.225 85.75,82.25 81.25,82.5 73.75,82.75 75,82.75 76,82.75 80.018,82.873 84.398,82.907 83.25,83.25 77.9,83.5 78.6,83.5 79.5,83.5 77.198,83.807 82.918,84.01 79.5,84.25 81.418,84.26 82.168,84.26 84.168,84.26 85.25,84.25 86.25,84.25 87.5,84.25 88.75,84.25 89.75,84.25 90.75,84.25 91.75,84.25 78.275,84.3
GPIO9: C14.1 R3.1 SW2.34 U2.15 | length 33.7
  L1(Sig) w0.11: v1(95.799,71.418) 95.799,71.382 96.075,71.107 SW2.34@96.075,68.425
  L1(Sig) w0.125: v1(75.612,74.312) 77.055,74.312 77.493,74.75 U2.15 ; C14.1 R3.1 95.5,73.95 96.075,73.375 96.075,72.575 96.062,72.562 96.062,71.67 95.81,71.418 v1(95.799,71.418)
  L4(Sig) w0.125: v1(75.612,74.312) 75.612,73.688 80.255,69.045 85.201,69.045 87.573,71.418 v1(95.799,71.418)
I2C.SCK: AC1.13 R14.1 U2.10 U3.1 | length 18
  L1(Sig) w0.11: v1(76.438,78.116) 76.438,78.037 v1(77.225,77.25) U2.10
  L4(Sig) w0.11: R14.1 73.75,78.692 74.326,78.116 v1(76.438,78.116) ; v1@77.217,77.25 76.735,76.768 76.735,75.606 78.091,74.25 U3.1 ; v1@77.25,77.25 77.8,76.7 AC1.13
I2C.SDA: AC1.14 R13.1 U2.9 U3.16 | length 19.2
  L1(Sig) w0.11: v1(77.168,78.097) 77.168,78.069 77.489,77.748 U2.9@78.098,77.748
  L4(Sig) w0.11: R13.1 76.791,79.25 77.13,78.911 v1@77.13,78.127 ; AC1.14 78.68,77.2 77.783,78.097 77.09,78.097 76.378,77.385 76.378,75.39 77.86,73.907 85.058,73.907 85.071,73.895 85.155,73.895 85.25,73.8 U3.16
LDO_EN: IC1.4 IC2.5 | length 13.7
  L1(Sig) w0.125: v1(77.8,66.7) 77.751,66.7 77.422,66.371 77.422,65.14 77.886,64.676 78.081,64.676 IC1.4@78.1,64.657 ; v1(86.866,68.454) 87.954,68.454 IC2.5
  L4(Sig) w0.125: v1(77.8,66.7) 78.622,67.522 78.622,67.704 79.373,68.454 v1(86.866,68.454)
NetAC1_4: AC1.4 U2.8 | length 4.6
  L1(Sig) w0.11: v1(78.023,78.812) 78.129,78.812 78.259,78.683 78.68,78.683 78.75,78.613 U2.8
  L4(Sig) w0.11: v1(78.023,78.812) 80.419,78.812 80.861,78.37 80.861,77.861 AC1.4
NetAC1_9: AC1.9 U2.13 | length 5
  L1(Sig) w0.11: v1(77.199,75.75) U2.13
  L4(Sig) w0.11: v1(77.199,75.75) 78.064,74.885 80.185,74.885 80.35,75.049 AC1.9
NetBAT+_1: BAT+.1 C35.2 C37.2 FB2.1
NetC1_2: C1.2 R1.2 X1.1 | length 3.1
  L1(Sig) w0.11: R1.2 86.088,76.788 86.301,76.788 86.749,77.237 87.137,77.237 C1.2 87.7,77.3 87.974,77.026 88.274,77.026 X1.1
NetC9_2: C9.2 L2.2 U2.2 U2.3
NetC13_1: C13.1 R2.1 SW1.34 U2.7 | length 25.7
  L1(Sig) w0.125: v1(78.56,79.401) 78.594,79.367 78.895,79.367 79.259,79.003 79.259,78.409 U2.7 ; v1(90.757,79.292) 91.79,78.258 C13.1@92.492,78.258 ; R2.1 C13.1 92.514,78.264 92.964,78.264 93.8,79.1 95.35,79.1 ; SW1.34@96.325,77.925 96.325,78.125 95.35,79.1 ; SW1.34@96.325,82.075 96.325,81.875 95.35,80.9 95.35,79.1
  L4(Sig) w0.125: v1(78.56,79.401) 80.578,79.401 81.03,78.949 86.738,78.949 87.243,79.455 90.496,79.455 90.659,79.292 v1(90.757,79.292)
NetC20_1: C20.1 IC2.1 SW3.34 | length 9.8
  L1(Sig) w0.125: IC2.1 92.752,67.55 93.627,66.675 93.725,66.675 93.925,66.475 93.925,62.125 93.925,61.375 94.5,60.8 C20.1
NetC24_1: C24.1 U3.10 | length 1.1
  L4(Sig) w0.125: U3.10 88.35,75.25 C24.1
NetD1_K: D1.K R4.1 | length 1.2
  L1(Sig) w0.25: R4.1 D1.K
NetD2_K: D2.K R6.1 | length 1.2
  L1(Sig) w0.25: R6.1 D2.K
NetIC3_5: IC3.5 R6.2 | length 1.8
  L1(Sig) w0.25: v1(73.617,62.393) 73.645,62.422 74.422,62.422 R6.2
  L4(Sig) w0.25: v1(73.617,62.393) 73.638,62.372 74.504,62.372 IC3.5
NetIC3_8: IC3.8 R5.1 | length 1.5
  L4(Sig) w0.25: R5.1 74.4,64.125 74.425,64.1 IC3.8
NetIC5_1: IC5.1 R11.1 | length 6.9
  L1(Sig) w0.11: R11.1 90.089,71.5 92.555,73.966 v1(92.643,73.966)
  L4(Sig) w0.11: IC5.1 92.572,75.023 92.572,74.037 v1(92.643,73.966)
NetIC5_3: IC5.3 R12.1 | length 5.1
  L1(Sig) w0.11: R12.1 89.785,72.5 v1(91.269,73.984)
  L4(Sig) w0.11: v1(91.269,73.984) 91.269,74.089 91.5,74.32 IC5.3
NetIC5_4: IC5.4 TX.1 | length 6.3
  L4(Sig) w0.11: IC5.4 91.5,78.493 92.607,79.6 TX.1
NetIC5_6: IC5.6 RX.1 | length 3.8
  L4(Sig) w0.165: IC5.6 93.142,76.705 94.449,75.398 95.202,75.398 RX.1
NetJ1_A5: J1.A5 R7.1 | length 2.4
  L1(Sig) w0.11: v1(83.75,62.5) J1.A5
  L4(Sig) w0.11: R7.1 v1(83.75,62.5)
NetJ1_B5: J1.B5 R8.1 | length 2.5
  L1(Sig) w0.11: v1(86.499,62.512) 86.499,62.597 86.75,62.848 J1.B5
  L4(Sig) w0.11: R8.1 v1(86.499,62.512)
NetR9_2: R9.2 U2.6 | length 4.6
  L1(Sig) w0.11: v1(77.479,79.822) 77.523,79.867 78.807,79.867 79.73,78.943 79.73,78.42 U2.6
  L4(Sig) w0.11: R9.2@76.753,80.75 76.753,80.24 77.141,79.852 77.45,79.852 v1(77.479,79.822)
NetR10_2: R10.2 U2.14 | length 3.8
  L1(Sig) w0.11: v1(76.337,74.75) 77.003,74.75 77.503,75.25 U2.14
  L4(Sig) w0.11: R10.2 v1(76.337,74.75)
NetR11_2: R11.2 U2.27 | length 6.5
  L1(Sig) w0.11: U2.27 82.957,75.193 83.975,75.193 84.991,74.178 84.991,72.776 86.266,71.5 R11.2
NetR12_2: R12.2 U2.28 | length 5.8
  L1(Sig) w0.11: U2.28 83.125,75.75 83.195,75.68 83.258,75.68 83.259,75.679 84.036,75.679 85.431,74.284 85.431,73.759 86.599,72.59 86.91,72.59 R12.2
NetU2_16: U2.16 U3.15 | length 11.9
  L1(Sig) w0.125: v1(76.709,73.875) 76.777,73.806 77.196,73.806 77.636,74.246 78.096,74.246 U2.16
  L4(Sig) w0.125: v1(76.709,73.875) 76.725,73.875 77.045,73.555 81.145,73.555 82.101,72.599 85.399,72.599 85.75,72.95 U3.15
RF: C4.2 L1.2 U2.1 | length 2.2
  L1(Sig) w0.156: U2.1 82.25,78.625 82.254,78.625 82.4,78.771 C4.2 L1.2
SPICLK: U1.6 U2.22 | length 6.1
  L1(Sig) w0.125: U1.6 79.198,71.048 78.562,71.048 78.441,71.169 78.441,71.761 78.823,72.143 79.58,72.143 79.741,72.304 81.352,72.304 81.425,72.377 81.425,72.872 81.25,73.047 U2.22@81.25,73.7
SPICS0: U1.1 U2.21 | length 7.3
  L1(Sig) w0.125: U2.21@80.75,73.7 80.75,73 80.898,72.852 v1(80.898,72.751) ; U1.1 v1(83.25,70.1)
  L4(Sig) w0.125: v1(80.898,72.751) 81.448,72.2 83.1,72.2 83.75,71.55 83.75,70.6 v1(83.25,70.1)
SPID: U1.5 U2.23 | length 4.2
  L1(Sig) w0.125: U1.5 79.843,71.6 80.213,71.97 81.435,71.97 81.75,72.285 U2.23@81.75,73.7
SPIHD: U1.7 U2.19 | length 5.4
  L1(Sig) w0.125: U1.7 78.283,70.6 77.939,70.944 77.939,71.889 78.543,72.493 79.253,72.493 79.75,72.99 U2.19@79.75,73.7
SPIQ: U1.2 U2.24 | length 4.9
  L1(Sig) w0.125: U1.2 83.16,70.6 83.448,70.888 83.448,71.557 82.25,72.755 U2.24@82.25,73.7
SPIWP: U1.3 U2.20 | length 5.5
  L1(Sig) w0.125: v1(80.129,72.766) 80.129,72.845 80.25,72.966 U2.20@80.25,73.7 ; U1.3 81.968,71.118 82.676,71.118 82.873,71.314 v1(82.937,71.314)
  L4(Sig) w0.125: v1(80.129,72.766) 80.129,72.743 81.192,71.68 82.637,71.68 82.937,71.38 v1(82.937,71.314)
USB.D_N: IC4.3 U2.25 | length 6.6
  L1(Sig) w0.166: U2.25 83.548,74.25 83.999,73.8 83.999,72.2 84.89,71.308 84.89,69.917 84.613,69.64 84.613,69.018 IC4.3
USB.D_P: IC4.1 U2.26 | length 7.3
  L1(Sig) w0.166: U2.26 83.632,74.75 83.712,74.67 83.722,74.67 84.419,73.974 84.419,72.374 85.31,71.482 85.31,69.916 85.587,69.64 85.587,69.018 IC4.1
Vbat: C18.2 C21.2 C42.2 C44.2 FB2.2 IC1.6 IC2.6 IC3.3 IC3.4 | length 10.3
  L1(Sig) w0.25: IC1.6 79.35,64.65 81.45,66.75 v1(81.5,66.75) ; v1(86.9,67.5) 87.95,67.5 IC2.6
  L4(Sig) w0.25: v1(81.5,66.75) 81.5,66.8 82.2,67.5 v1(86.9,67.5)
  other v1: 78.2,62.7 78.8,62.7
VDD: C25.2 C27.2 FB1.1 IC4.5 J1.A4B9 J1.B4A9 | length 8.3
  L1(Sig) w0.11: v1(82.6,65.6) 83.498,66.498 83.498,67.375 84.322,68.199 84.882,68.199 85.09,67.991 85.09,67.405 IC4.5
  L1(Sig) w0.5: J1.A4B9 v1(82.6,65.6) ; J1.B4A9 v1(87.4,65.6)
VDD_SPI: C12.2 U1.8 U2.18 | length 6.6
  L1(Sig) w0.25: U1.8 78,70.1 77.6,70.1 77.552,70.1 77.401,70.251 77.25,70.402 77.25,71.793 78.418,72.961 79.07,72.961 79.251,73.142 U2.18@79.251,73.408 ; U2.18@79.25,73.699 U2.18@79.25,73.409 ; U2.18@79.25,73.409 U2.18@79.251,73.408
Vin: C22.2 C32.2 C34.2 D2.A FB1.2 IC3.1 IC3.2 | length 3.9
  L1(Sig) w0.25: D2.A 74.5,65.65 74.675,65.825 74.675,65.975 v1(75.1,66.4)
  L4(Sig) w0.25: v1(75.1,66.4) 76.795,66.4 77.325,65.87 77.325,65.675 C34.2
XTAL_N: C2.2 U2.29 X1.3 | length 8.2
  L1(Sig) w0.11: U2.29 84.251,76.25 84.801,75.7 85.238,75.7 86.588,74.351 87.051,74.351 C2.2 87.355,74.345 89.345,74.345 89.925,74.925 X1.3
XTAL_P: R1.1 U2.30 | length 2.1
  L1(Sig) w0.11: U2.30 84.75,76.75 R1.1
pads on no net: AC1.2 AC1.3 AC1.7 AC1.10 AC1.11 IC1.5 IC2.4 IC3.7 J1.A8 J1.B8 J1.MH J1.SH U2.4 U2.5 U2.12 U3.3 U3.5 U3.6 U3.7 U3.8 U3.12 U3.14

## Polygon pours and split planes (outlines as drawn)
GND on L1(Sig) "GND_L01_P011" (solid, remove dead copper, pour order 11): 72.5,58 ccw(c73,58) 73,57.5 77.4,57.5 cw(c78,57.5) 78,58.1 cw(c78,57.5) 78.6,57.5 91.4,57.5 cw(c92,57.5) 92,58.1 cw(c92,57.5) 92.6,57.5 97,57.5 ccw(c97,58) 97.5,58 97.5,83 ccw(c96.75,83) 96.75,83.75 94.25,83.75 cw(c94.25,85) 93,85 93,89.5 ccw(c92.5,89.5) 92.5,90 77.5,90 ccw(c77.5,89.5) 77,89.5 77,85 cw(c75.75,85) 75.75,83.75 73.25,83.75 ccw(c73.25,83) 72.5,83
Vbat on L1(Sig) "VBAT_L01_P001" (solid, remove dead copper, pour order 1): 77.9,61.4 79.1,61.4 79.1,63.1 79.1,64.952 78.8,64.952 78.8,63.5 78.5,63.1 77.9,63.1
3v3 on L1(Sig) "3V3_L01_P010" (solid, remove dead copper, pour order 10): 78.4,65.7 79,65.7 79,66.7 79.6,67.3 80.1,67.3 80.1,67.994 77.4,67.994 77.4,67.3 78.1,67.3 78.4,67
NetC9_2 on L1(Sig) "NETC9_2_L01_P007" (solid, remove dead copper, pour order 7): 81.1,78.1 81.9,78.1 81.9,78.9 81.5,79.3 81.5,81 80.9,81 80.9,79.1 81.1,78.9
NetBAT+_1 on L1(Sig) "NETBAT+_1_L01_P000" (solid, pour order 0): 77,58.8 79,58.8 79,60.8 77.655,60.795 77.5,61 77.5,62.2 76.9,62.2 76.2,61.5 74.9,61.5 74.9,60.9 76.7,60.9 77,60.6
GND on L4(Sig) "GND_L04_P012" (solid, remove dead copper, pour order 12): 72.5,58 ccw(c73,58) 73,57.5 77.4,57.5 cw(c78,57.5) 78,58.1 cw(c78,57.5) 78.6,57.5 91.4,57.5 cw(c92,57.5) 92,58.1 cw(c92,57.5) 92.6,57.5 97,57.5 ccw(c97,58) 97.5,58 97.5,83 ccw(c96.75,83) 96.75,83.75 94.25,83.75 cw(c94.25,85) 93,85 93,89.5 ccw(c92.5,89.5) 92.5,90 77.5,90 ccw(c77.5,89.5) 77,89.5 77,85 cw(c75.75,85) 75.75,83.75 73.25,83.75 ccw(c73.25,83) 72.5,83
Vin on L4(Sig) "VIN_L04_P006" (solid, remove dead copper, pour order 6): 77.047,63.457 77.8,63.457 77.8,64.1 78.109,64.409 79.332,64.409 80.149,65.349 80.7,65.349 80.7,66.045 77.2,66.045 77.2,64.8 77.047,64.647
Vbat on L4(Sig) "VBAT_L04_P004" (solid, remove dead copper, pour order 4): 77,63.15 79.1,63.15 79.1,60.2 77.2,60.2 76.5,60.9 76.5,61.5 76.84,61.5 77,61.66 77,62.4
VDD on L4(Sig) "VDD_L04_P005" (solid, remove dead copper, pour order 5): 87.642,65.291 83.5,65.291 83.5,64.5 81.754,64.5 81.754,64.746 81.1,65.357 81.1,66.044 87.653,66.044
GND on L3(GND) (split plane): 92.49,85 92.49,84.993 92.498,84.827 92.524,84.657 92.566,84.489 92.624,84.326 92.698,84.17 92.787,84.022 92.889,83.883 93.005,83.755 93.133,83.639 93.272,83.537 93.42,83.448 93.576,83.374 93.739,83.316 93.907,83.274 94.077,83.248 94.243,83.24 94.25,83.24 96.75,83.24 96.759,83.24 96.813,83.233 96.871,83.209 96.921,83.171 96.959,83.121 96.983,83.063 96.99,83.009 96.99,83 96.99,58.01 92.984,58.01 92.962,58.055 92.881,58.176 92.785,58.285 92.676,58.381 92.555,58.462 92.425,58.526 92.287,58.573 92.145,58.601 92.003,58.61 92,58.61 91.998,58.61 91.855,58.601 91.713,58.573 91.575,58.526 91.445,58.462 91.324,58.381 91.215,58.285 91.119,58.176 91.038,58.055 91.016,58.01 78.984,58.01 78.962,58.055 78.881,58.176 78.785,58.285 78.676,58.381 78.555,58.462 78.425,58.526 78.287,58.573 78.145,58.601 78.002,58.61 78,58.61 77.998,58.61 77.855,58.601 77.713,58.573 77.575,58.526 77.445,58.462 77.324,58.381 77.215,58.285 77.119,58.176 77.038,58.055 77.016,58.01 73.01,58.01 73.01,83 73.01,83.009 73.017,83.063 73.041,83.121 73.079,83.171 73.129,83.209 73.187,83.233 73.241,83.24 73.25,83.24 75.75,83.24 75.757,83.24 75.923,83.248 76.093,83.274 76.261,83.316 76.424,83.374 76.58,83.448 76.728,83.537 76.867,83.639 76.995,83.755 77.111,83.883 77.213,84.022 77.302,84.17 77.376,84.326 77.434,84.489 77.476,84.657 77.502,84.827 77.51,84.993 77.51,85 77.51,89.49 92.49,89.49
GND on L2(GND) (split plane): 92.49,85 92.49,84.993 92.498,84.827 92.524,84.657 92.566,84.489 92.624,84.326 92.698,84.17 92.787,84.022 92.889,83.883 93.005,83.755 93.133,83.639 93.272,83.537 93.42,83.448 93.576,83.374 93.739,83.316 93.907,83.274 94.077,83.248 94.243,83.24 94.25,83.24 96.75,83.24 96.759,83.24 96.813,83.233 96.871,83.209 96.921,83.171 96.959,83.121 96.983,83.063 96.99,83.009 96.99,83 96.99,58.01 92.984,58.01 92.962,58.055 92.881,58.176 92.785,58.285 92.676,58.381 92.555,58.462 92.425,58.526 92.287,58.573 92.145,58.601 92.003,58.61 92,58.61 91.998,58.61 91.855,58.601 91.713,58.573 91.575,58.526 91.445,58.462 91.324,58.381 91.215,58.285 91.119,58.176 91.038,58.055 91.016,58.01 78.984,58.01 78.962,58.055 78.881,58.176 78.785,58.285 78.676,58.381 78.555,58.462 78.425,58.526 78.287,58.573 78.145,58.601 78.002,58.61 78,58.61 77.998,58.61 77.855,58.601 77.713,58.573 77.575,58.526 77.445,58.462 77.324,58.381 77.215,58.285 77.119,58.176 77.038,58.055 77.016,58.01 73.01,58.01 73.01,83 73.01,83.009 73.017,83.063 73.041,83.121 73.079,83.171 73.129,83.209 73.187,83.233 73.241,83.24 73.25,83.24 75.75,83.24 75.757,83.24 75.923,83.248 76.093,83.274 76.261,83.316 76.424,83.374 76.58,83.448 76.728,83.537 76.867,83.639 76.995,83.755 77.111,83.883 77.213,84.022 77.302,84.17 77.376,84.326 77.434,84.489 77.476,84.657 77.502,84.827 77.51,84.993 77.51,85 77.51,89.49 92.49,89.49

## Keep-outs
Keep-Out Layer:
  the board outline again, w0.3

## Other copper
L1(Sig):
  pour cut-out: 84.4,67 85.8,67 85.8,65.7 86,65.5 86,62.6 84,62.6 84,65.2 84.4,65.6
  pour cut-out: 78.419,78.099 78.419,73.75 82.75,73.75 82.75,78.099
  pour cut-out: 86.919,77.849 86.919,73.849 90.5,73.849 90.5,77.849
  pour cut-out: 83.4,74.9 83.4,72.288 84.4,71.288 84.4,69.4 85.8,69.4 85.8,71.7 84.75,72.75 84.75,74 84.1,74.9
  pour cut-out: 79.75,84.55 79.75,83.5 80.35,82.9 82.9,82.9 82.9,83.5 82.5,83.9 81,83.9 81,84.55
Multi-Layer:
  pour cut-out: 93.25,84.55 76.75,84.55 76.75,90.25 93.25,90.25
  pour cut-out: 76.75,84.55 93.25,84.55 93.25,90.25 76.75,90.25

## Silkscreen, mask and mechanical layers (free items; w line width, h text height)
Top Overlay:
  text "RST" at 92.883,80.35 h1.5 r90
  text "BOOT" at 92.633,68.6 h1.5 r90
  text "ON/OFF" at 92.633,61.85 h1.5 r90

## Text inside footprints (layer, text, board x,y; h text height)
D1: Mechanical 13 "+" at 79.033,67.142 h0.5 r180
D2: Mechanical 13 "+" at 74.958,67.033 h0.5 r270